# Altium PCB PCB2.PcbDoc
Units mm, origin at the board's own origin, x right, y up, seen from the top; angles counter-clockwise.
Board outline 53.97 x 60.32 mm, 2 copper layers (Top Layer, Bottom Layer); 19 components, 44 nets, 105 pads, 11 vias.
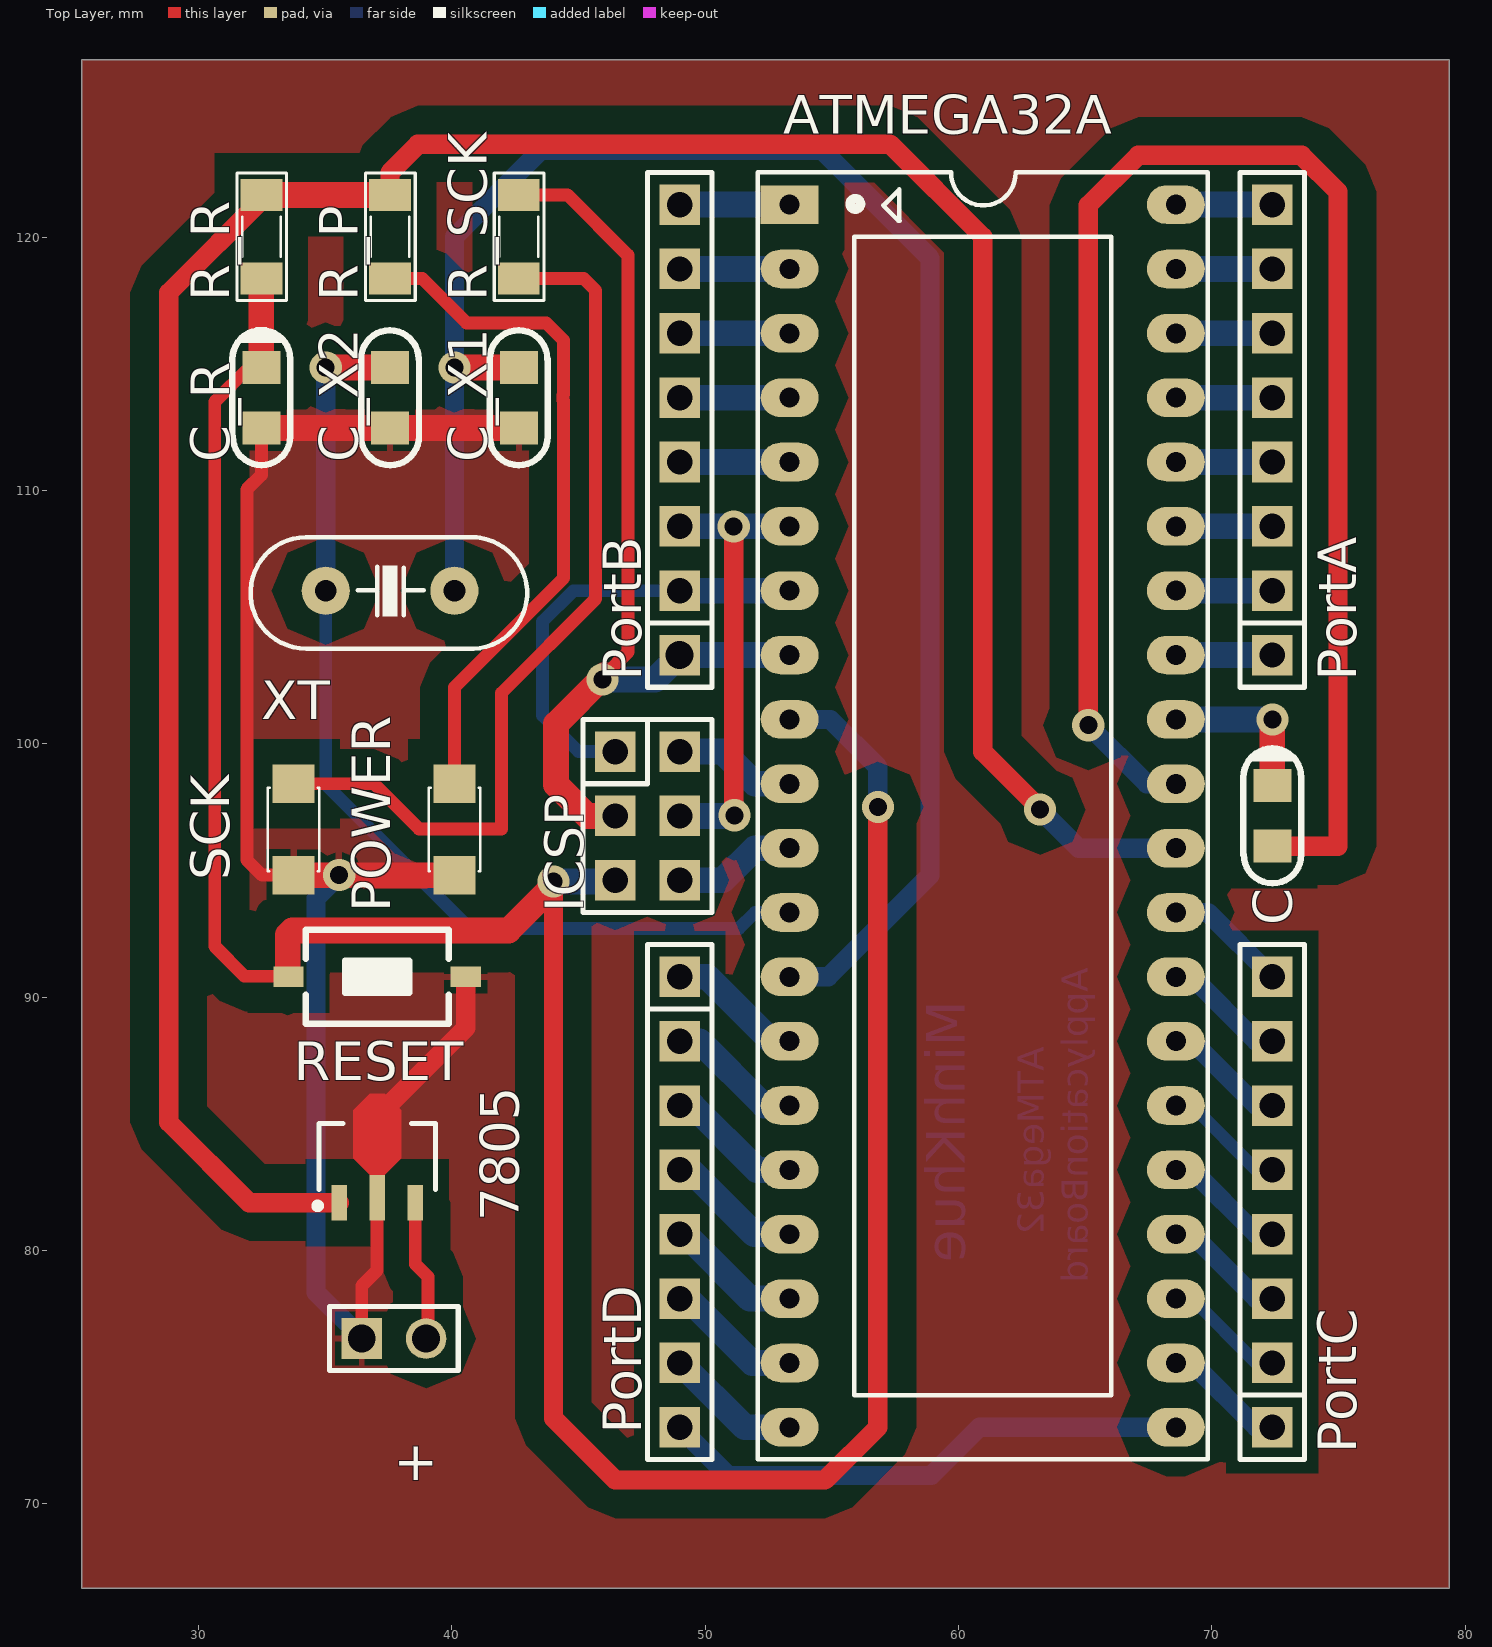
[diagram p0: Top Layer view]
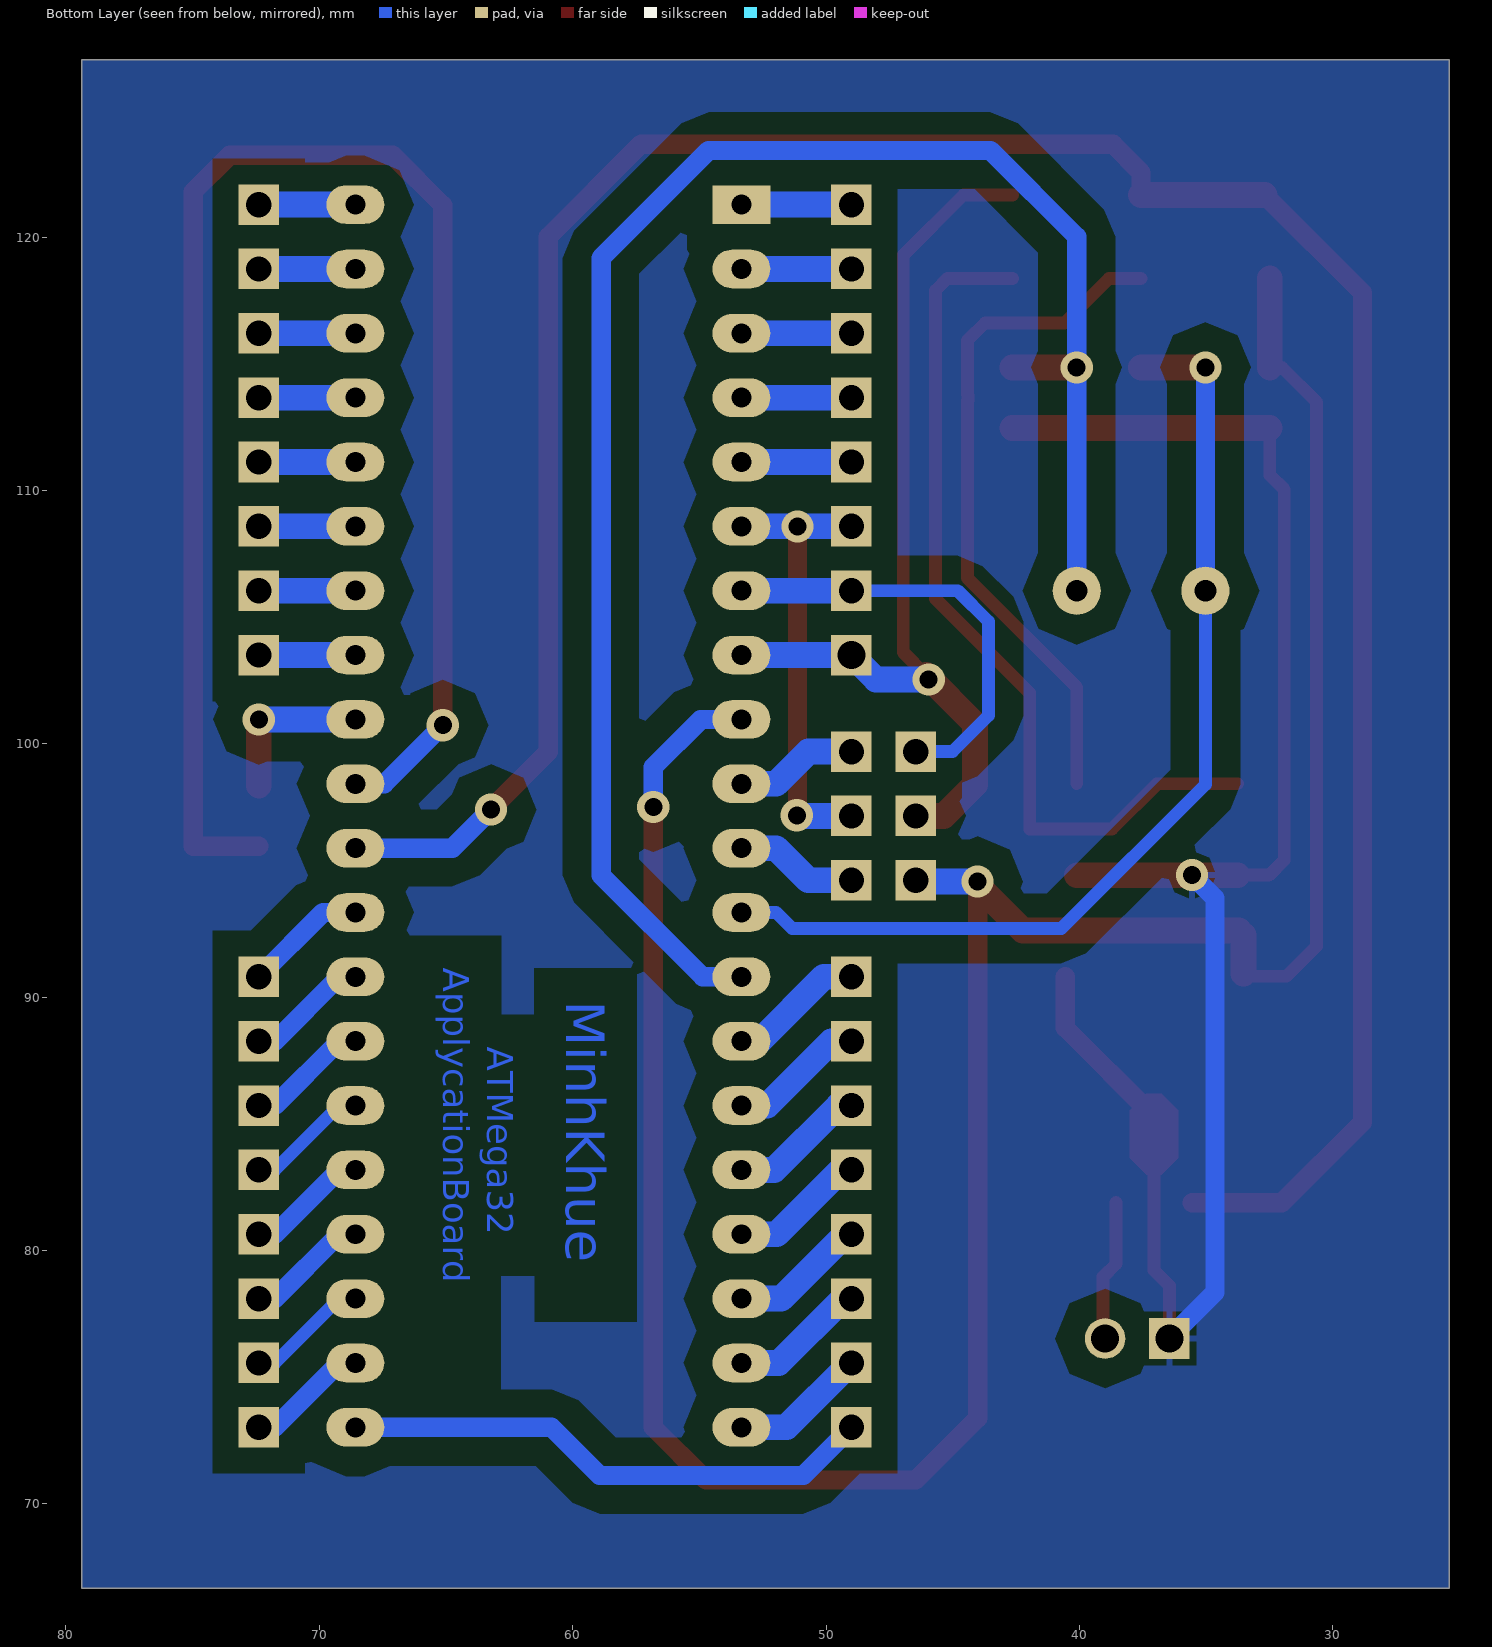
[diagram p1: Bottom Layer view, seen from below]
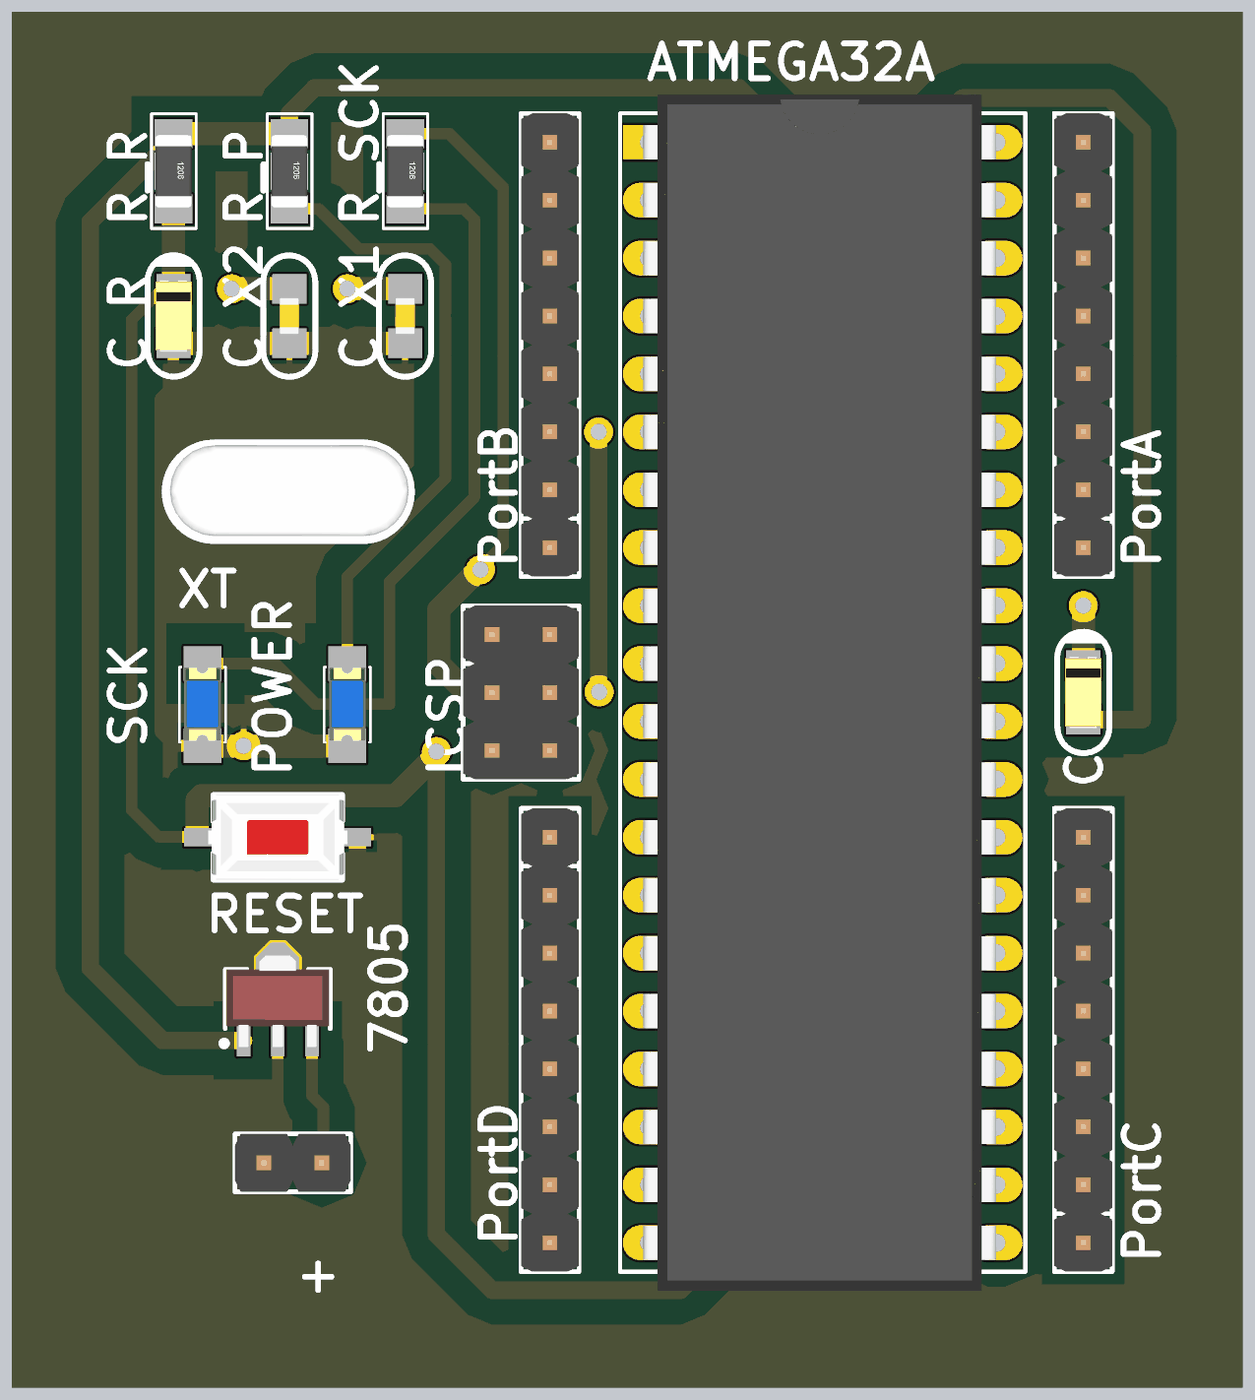
[diagram p2: 3D render of the assembled board from above, using the file's embedded part models]

## Layer stack, top to bottom
Top Solder: solder mask 0.0102, Solder Resist, Dk 3.5
Top Layer: signal copper 0.0356
Dielectric 1: dielectric 0.32, FR-4, Dk 4.8
Bottom Layer: signal copper 0.0356
Bottom Solder: solder mask 0.0102, Solder Resist, Dk 3.5

## Board outline
25.4,66.675 25.4,127 79.375,127 79.375,66.675

## Design rules (kind name [scope] priority, off if disabled: settings)
Clearance Clearance_1 [InPolygon] p1: gap=1.016
Clearance [All] p2: gap=0.762
PolygonConnect [All] p1: connectstyle=Relief reliefconductorwidth=0.254 reliefentries=4 polygonreliefangle="90 Angle" airgapwidth=0.254
RoutingVias [All] p1: holewidth=0.711 width=1.27 viastyle="Through Hole" minholewidth=0.711 minwidth=1.27 maxholewidth=0.711 maxwidth=1.27
SMDNeckDown [All] p1: percent=50.000
SolderMaskExpansion [All] p1: expansion=0.102
Width [All] p1: maxlimit=1.27 minlimit=0.508 preferedwidth=0.762
30 further rules are at their usual default settings.

## Components (designator, comment, footprint, x,y, rotation, side; value= is the part's Value field where it differs from the comment)
7805 "LM78xx" SOT89-321 37.059,83.693 r90 top
+ "KF2" JP2-D1T 36.449,76.53 r0 top (schematic designator J_P)
ATMEGA32A "ATmega32A-PU" DIP40/W0.6 53.34,121.285 r270 top
C "Cap Pol" C-P-0805 72.39,97.155 r270 top
C_R "Cap Pol" C-P-0805 32.487,113.665 r270 top
C_X1 "Cap Non-pol" C-NP-0805 42.647,113.665 r90 top
C_X2 "Cap Non-pol" C-NP-0805 37.567,113.665 r90 top
ICSP "JP3x2" JP3-D2T 47.727,97.155 r270 top
PortA "JP8" JP8-D1T#1 72.39,103.505 r90 top
PortB "JP8" JP8-D1T#2 48.997,103.505 r90 top
PortC "JP8" JP8-D1T#1 72.39,73.025 r90 top
PortD "JP8" JP8-D1T#1 48.997,90.805 r270 top
POWER "LED" LED-1206-Blue 40.107,98.425 r270 top (schematic designator LED_P)
R_P "330" RES-SMD-1206 37.567,120.015 r270 top
R_R "10K" RES-SMD-1206 32.487,120.015 r270 top
R_SCK "330" RES-SMD-1206 42.647,120.015 r270 top
RESET "SW" SW1-SMD 37.059,90.805 r180 top (schematic designator SW)
SCK "LED" LED-1206-Blue 33.757,98.425 r270 top (schematic designator LED_SCK)
XT "16Mhz" XT2 37.567,106.045 r180 top

## Footprints (in the part's own frame and the unit in brackets; to place one, negate y for a bottom-side part, rotate by r counter-clockwise, add the part's x,y. Pads: shape width x height; smd on the part's side, far side on the other; paste and mask are expansions set on the pad)
C-NP-0805 [mm] "Chip Capacitor; Non-polarized; Body 2.0 x 1.3 mm (LxW typ) [2012]"
  rect 1.3x1.5 smd: 1(-1.194,0) 2(1.194,0)
  silkscreen extent -2.67,-1.14 2.66,1.14, body extent -0.8,-0.43 0.8,0.43, height 0.79
C-P-0805 [mm] "Chip Capacitor; Polarized; Body 2.0 x 1.3 mm (LxW typ) [2012]"
  rect 1.3x1.5 smd: 1(-1.194,0) 2(1.194,0)
  silkscreen extent -2.67,-1.14 2.66,1.14, body extent -1.6,-0.8 1.6,0.8, height 1.61
DIP40/W0.6 [mil] "40 PIN, W 600mil, Pin to pin 100mil"
  rect 60x90 hole 31: 1(0,0)
  oval 60x90 hole 31: 2(100,0) 3(200,0) 4(300,0) 5(400,0) 6(500,0) 7(600,0) 8(700,0) 9(800,0) 10(900,0) 11(1000,0) 12(1100,0) 13(1200,0) 14(1300,0) 15(1400,0) 16(1500,0) 17(1600,0) 18(1700,0) 19(1800,0) 20(1900,0) 21(1900,600) 22(1800,600) 23(1700,600) 24(1600,600) 25(1500,600) 26(1400,600) 27(1300,600) 28(1200,600) 29(1100,600) 30(1000,600) 31(900,600) 32(800,600) 33(700,600) 34(600,600) 35(500,600) 36(400,600) 37(300,600) 38(200,600) 39(100,600) 40(0,600)
  silkscreen extent -50,-50 1950,650, body extent -82,-10 1982,600, height 224
JP2-D1T [mm] "2 pins, 1 row, straight, gold plating"
  rect 1.6x1.6 hole 1.1: 1(0,0)
  round 1.6 hole 1.1: 2(2.54,0)
  silkscreen extent -1.27,-1.27 3.81,1.27, body extent -1.27,-1.27 3.81,1.27, height 8.54
JP3-D2T [mm] "6 pins, dual pin, straight, gold plating"
  rect 1.6x1.6 hole 1: 1(-2.54,-1.27) 2(0,-1.27) 3(2.54,-1.27) 4(2.54,1.27) 5(0,1.27) 6(-2.54,1.27)
  silkscreen extent -3.81,-2.54 3.81,2.54, body extent -3.81,-2.54 3.81,2.54, height 8.55
JP8-D1T#1 [mm] "8 pins, 1 row, straight, gold plating"
  rect 1.6x1.6 hole 1: 1(0,0) 2(2.54,0) 3(5.08,0) 4(7.62,0) 5(10.16,0) 6(12.7,0) 7(15.24,0) 8(17.78,0)
  silkscreen extent -1.27,-1.27 19.05,1.27, body extent -1.27,-1.27 19.05,1.27, height 8.54
JP8-D1T#2 [mm] "8 pins, 1 row, straight, gold plating"
  rect 1.6x1.6 hole 1.1: 1(0,0)
  rect 1.6x1.6 hole 1: 2(2.54,0) 3(5.08,0) 4(7.62,0) 5(10.16,0) 6(12.7,0) 7(15.24,0) 8(17.78,0)
  silkscreen extent -1.27,-1.27 19.05,1.27, body extent -1.27,-1.27 19.05,1.27, height 8.54
LED-1206-Blue [mil] "Compoment SMD 120x60mil"
  rect 60x65 smd: 1(0,0) 2(142,0)
  silkscreen extent 6,-40 136,40, body extent 7,-31 133,32, height 43
RES-SMD-1206 [mil]
  rect 50x65 smd: 1(-65,0) 2(65,0)
  silkscreen extent -99,-38 99,39, body extent -63,-31 63,32, height 40
SOT89-321 [mm] "SOT89, 3-Leads, Body 4.55x2.55mm, Pitch 1.50mm, Lead Span 4.1mm, IPC Medium Density"
  rect 1.4x0.6 smd: 1(-1.8,-1.5) 3(-1.8,1.5)
  rect 1.8x0.6 smd: 2(-1.6,0)
  Top Layer region: -0.7,0.3 -0.05,0.95 1.85,0.95 2.5,0.3 2.5,-0.3 1.85,-0.95 -0.05,-0.95 -0.7,-0.3
  silkscreen extent -2.05,-2.3 1.32,2.47, body extent -2.08,-2.25 1.92,2.25, height 1.5
SW1-SMD [mm]
  rect 1.2x0.8 smd: 1(-3.5,0) 2(3.5,0)
  silkscreen extent -2.82,-1.85 2.82,1.85, body extent -3.05,-1.85 3.05,1.85, height 2.5
XT2 [mil] "Footpin for Crystal 2 pin"
  round 75 hole 34: 1(-100,0) 2(100,0)
  silkscreen extent -213,-83 217,90, body extent -216,-87 216,90, height 144

## Part data
7805: "Positive Voltage Regulator"
ATMEGA32A: "8-Bit AVR Microcontroller with 32K Bytes of In-System Programmable Flash Memory"
C C_R: "Polarized Capacitor"
C_X1 C_X2: "Non-polarized Capacitor"
ICSP: "WR-PHD 2.54 mm Dual Socket Header"
PortA PortB PortC PortD: "WR-PHD 2.54 mm Angled Socket Header"
POWER SCK: library part "LED SMD"
R_P R_R R_SCK: library part Res-SMD, "Resistor"
RESET: library part SW2, "Switch button 2 pin"
XT: library part XT2, "Crystal, 32.768 KHz, -40 to 85 degC, 3.2 x 1.5 x 0.9 mm SMD"

## Via types
v1: diameter 1.27, hole 0.711, Top Layer to Bottom Layer, 11 vias

## Nets (pads, with @x,y where several pads share a name; then routed paths per layer and width w, separated by ;. In a path a pad name is that pad's centre, name@x,y a point inside that pad or via, vN(x,y) a via of type N, cw(c..) or ccw(c..) an arc to the next point about the centre after c; other vN are vias at no path point)
GND: 7805.2 +.1 C_R.2 C_X1.1 C_X2.1 POWER.2 RESET.1 SCK.2 | length 71.3
  Top Layer w0.508: C_R.2 32.487,110.617 31.915,110.045 31.915,95.415 32.512,94.818 SCK.2 ; +.1 36.449,78.613 37.059,79.223 37.059,85.293
  Top Layer w0.762: 37.059,85.293 40.559,88.793 RESET.1
  Top Layer w1.016: C_R.2 C_X2.1 C_X1.1 ; SCK.2 v1(35.56,94.818) POWER.2
  Bottom Layer w0.762: v1(35.56,94.818) 34.646,93.904 34.646,78.359 36.349,76.656 +.1@36.349,76.43
NetATMEGA32A_1: ATMEGA32A.1 PortB.8 | length 4.3
  Bottom Layer w1.016: PortB.8 ATMEGA32A.1
NetATMEGA32A_2: ATMEGA32A.2 PortB.7 | length 4.3
  Bottom Layer w1.016: PortB.7 ATMEGA32A.2
NetATMEGA32A_3: ATMEGA32A.3 PortB.6 | length 4.3
  Bottom Layer w1.016: PortB.6 ATMEGA32A.3
NetATMEGA32A_4: ATMEGA32A.4 PortB.5 | length 4.3
  Bottom Layer w1.016: PortB.5 ATMEGA32A.4
NetATMEGA32A_5: ATMEGA32A.5 PortB.4 | length 4.3
  Bottom Layer w1.016: PortB.4 ATMEGA32A.5
NetATMEGA32A_6: ATMEGA32A.6 ICSP.5 PortB.3 | length 17.9
  Top Layer w0.508: v1@51.13,97.206 v1(51.156,97.18)
  Top Layer w0.762: v1@51.13,97.206 v1(51.13,108.585)
  Bottom Layer w0.508: v1@51.13,97.155 v1(51.156,97.18)
  Bottom Layer w1.016: ICSP.5 v1@51.13,97.155 ; PortB.3 v1(51.13,108.585) ATMEGA32A.6
NetATMEGA32A_7: ATMEGA32A.7 ICSP.1 PortB.2 | length 17.4
  Bottom Layer w0.508: ICSP.1 45.009,99.695 43.586,101.117 43.586,104.826 44.806,106.045 PortB.2
  Bottom Layer w1.016: PortB.2 ATMEGA32A.7
NetATMEGA32A_8: ATMEGA32A.8 ICSP.2 PortB.1 R_SCK.1 | length 38
  Top Layer w0.508: R_SCK.1 44.577,121.666 46.953,119.29 46.953,103.62 v1@46.05,102.718
  Top Layer w1.016: v1@46.05,102.718 44.12,100.787 44.12,98.387 45.352,97.155 ICSP.2
  Bottom Layer w1.016: v1(45.949,102.54) 48.031,102.54 PortB.1 ATMEGA32A.8
NetATMEGA32A_9: ATMEGA32A.9 C_R.1 ICSP.3 R_R.2 RESET.2 | length 111.7
  Top Layer w0.508: C_R.1@32.004,114.859 30.645,113.5 30.645,92.011 31.826,90.83 RESET.2@33.553,90.83 ; RESET.2@33.477,90.805 RESET.2
  Top Layer w0.762: v1@44.018,94.412 44.018,73.381 46.457,70.942 54.737,70.942 56.82,73.025 v1(56.82,97.511)
  Top Layer w1.016: C_R.1 32.487,116.586 R_R.2 ; RESET.2@33.528,90.932 33.528,92.456 33.706,92.634 42.24,92.634 v1@44.018,94.412
  Bottom Layer w0.508: ICSP.3@46.406,94.564 ICSP.3
  Bottom Layer w0.762: ATMEGA32A.9 54.94,100.965 56.82,99.085 v1(56.82,97.511)
  Bottom Layer w1.016: v1(44.018,94.564) ICSP.3@46.406,94.564
NetATMEGA32A_10: ATMEGA32A.10 ICSP.6 | length 4.9
  Bottom Layer w1.016: ICSP.6 50.698,99.695 51.968,98.425 ATMEGA32A.10
NetATMEGA32A_11: ATMEGA32A.11 ICSP.4 | length 4.9
  Bottom Layer w1.016: ICSP.4 50.698,94.615 51.968,95.885 ATMEGA32A.11
NetATMEGA32A_12: ATMEGA32A.12 C_X2.2 XT.2 | length 39.9
  Top Layer w1.016: v1(35.027,114.859) C_X2.2
  Bottom Layer w0.508: XT.2 35.027,98.4 40.716,92.71 51.333,92.71 51.968,93.345 ATMEGA32A.12
  Bottom Layer w0.762: XT.2 v1(35.027,114.859)
NetATMEGA32A_13: ATMEGA32A.13 C_X1.2 XT.1 | length 70
  Top Layer w1.016: v1(40.107,114.859) C_X1.2
  Bottom Layer w0.762: XT.1 v1(40.107,114.859) 40.107,120.015 43.51,123.419 54.635,123.419 58.877,119.177 58.877,94.818 54.864,90.805 ATMEGA32A.13
NetATMEGA32A_14: ATMEGA32A.14 PortD.1 | length 5.4
  Bottom Layer w1.016: PortD.1 50.085,90.805 52.625,88.265 ATMEGA32A.14
NetATMEGA32A_15: ATMEGA32A.15 PortD.2 | length 5.4
  Bottom Layer w1.016: PortD.2 49.784,88.265 52.324,85.725 ATMEGA32A.15
NetATMEGA32A_16: ATMEGA32A.16 PortD.3 | length 5.4
  Bottom Layer w1.016: PortD.3 49.505,85.725 52.045,83.185 ATMEGA32A.16
NetATMEGA32A_17: ATMEGA32A.17 PortD.4 | length 5.4
  Bottom Layer w1.016: PortD.4 49.403,83.185 51.943,80.645 ATMEGA32A.17
NetATMEGA32A_18: ATMEGA32A.18 PortD.5 | length 5.4
  Bottom Layer w1.016: PortD.5 49.225,80.645 51.765,78.105 ATMEGA32A.18
NetATMEGA32A_19: ATMEGA32A.19 PortD.6 | length 5.4
  Bottom Layer w1.016: PortD.6 49.327,78.105 51.867,75.565 ATMEGA32A.19
NetATMEGA32A_20: ATMEGA32A.20 PortD.7 | length 5.4
  Bottom Layer w0.508: PortD.7 PortD.7@49.025,75.565
  Bottom Layer w1.016: PortD.7@49.025,75.565 51.565,73.025 ATMEGA32A.20
NetATMEGA32A_21: ATMEGA32A.21 PortD.8 | length 21.2
  Bottom Layer w0.762: PortD.8 50.902,71.12 58.928,71.12 60.833,73.025 ATMEGA32A.21
NetATMEGA32A_22: ATMEGA32A.22 PortC.1 | length 4.9
  Bottom Layer w0.762: ATMEGA32A.22 69.215,75.565 71.755,73.025 PortC.1
NetATMEGA32A_23: ATMEGA32A.23 PortC.2 | length 4.9
  Bottom Layer w0.508: ATMEGA32A.23 69.215,78.105 71.755,75.565 PortC.2
NetATMEGA32A_24: ATMEGA32A.24 PortC.3 | length 4.9
  Bottom Layer w0.762: ATMEGA32A.24 69.215,80.645 71.755,78.105 PortC.3
NetATMEGA32A_25: ATMEGA32A.25 PortC.4 | length 4.9
  Bottom Layer w0.762: ATMEGA32A.25 69.215,83.185 71.755,80.645 PortC.4
NetATMEGA32A_26: ATMEGA32A.26 PortC.5 | length 4.9
  Bottom Layer w0.508: ATMEGA32A.26 69.215,85.725 71.755,83.185 PortC.5
NetATMEGA32A_27: ATMEGA32A.27 PortC.6 | length 4.9
  Bottom Layer w0.762: ATMEGA32A.27 69.215,88.265 71.755,85.725 PortC.6
NetATMEGA32A_28: ATMEGA32A.28 PortC.7 | length 4.9
  Bottom Layer w0.762: ATMEGA32A.28 69.215,90.805 71.755,88.265 PortC.7
NetATMEGA32A_29: ATMEGA32A.29 PortC.8 | length 4.9
  Bottom Layer w0.762: ATMEGA32A.29 69.85,93.345 PortC.8
NetATMEGA32A_31: ATMEGA32A.31 C.2 | length 65
  Top Layer w0.508: v1@65.126,100.609 v1@65.278,100.457
  Top Layer w0.762: v1@65.126,100.609 65.126,121.26 67.094,123.228 73.546,123.228 74.981,121.793 74.981,95.961 C.2
  Bottom Layer w0.762: v1(65.126,100.736) 67.437,98.425 ATMEGA32A.31
NetATMEGA32A_32: ATMEGA32A.32 C.1 | length 6.4
  Top Layer w1.016: C.1 v1(72.39,100.965)
  Bottom Layer w1.016: ATMEGA32A.32 v1(72.39,100.965)
NetATMEGA32A_33: ATMEGA32A.33 PortA.1 | length 3.8
  Bottom Layer w1.016: ATMEGA32A.33 PortA.1
NetATMEGA32A_34: ATMEGA32A.34 PortA.2 | length 3.8
  Bottom Layer w1.016: ATMEGA32A.34 PortA.2
NetATMEGA32A_35: ATMEGA32A.35 PortA.3 | length 3.8
  Bottom Layer w1.016: ATMEGA32A.35 PortA.3
NetATMEGA32A_36: ATMEGA32A.36 PortA.4 | length 3.8
  Bottom Layer w1.016: ATMEGA32A.36 PortA.4
NetATMEGA32A_37: ATMEGA32A.37 PortA.5 | length 3.8
  Bottom Layer w1.016: ATMEGA32A.37 PortA.5
NetATMEGA32A_38: ATMEGA32A.38 PortA.6 | length 3.8
  Bottom Layer w1.016: ATMEGA32A.38 PortA.6
NetATMEGA32A_39: ATMEGA32A.39 PortA.7 | length 3.8
  Bottom Layer w1.016: ATMEGA32A.39 PortA.7
NetATMEGA32A_40: ATMEGA32A.40 PortA.8 | length 3.8
  Bottom Layer w1.016: ATMEGA32A.40 PortA.8
NetLED_P_1: POWER.1 R_P.2 | length 27.2
  Top Layer w0.508: R_P.2 38.837,118.364 40.589,116.611 43.731,116.611 44.413,115.93 44.413,113.788 44.399,113.775 44.399,113.555 44.413,113.542 44.413,106.541 40.107,102.235 POWER.1
NetLED_SCK_1: R_SCK.2 SCK.1 | length 35
  Top Layer w0.508: SCK.1 36.932,98.425 38.71,96.647 41.961,96.647 41.961,102.006 45.683,105.728 45.683,117.893 45.212,118.364 R_SCK.2
VCC: 7805.3 ATMEGA32A.30 R_P.1 R_R.1 | length 107.1
  Top Layer w0.508: R_R.1 R_R.1@32.69,121.666
  Top Layer w0.762: R_R.1@32.69,121.666 28.829,117.805 28.829,85.065 32.001,81.893 7805.3 ; R_P.1 37.567,122.555 38.684,123.673 ; 38.659,123.673 57.302,123.673 60.96,120.015 60.96,99.695 v1@63.208,97.447
  Top Layer w1.016: R_R.1@32.69,121.666 R_P.1
  Bottom Layer w0.762: v1(63.221,97.409) 64.745,95.885 ATMEGA32A.30
VIN: 7805.1 +.2 | length 5.5
  Top Layer w0.508: 7805.1 38.559,79.473 39.063,78.969 +.2@39.063,76.581

## Polygon pours and split planes (outlines as drawn)
GND on Bottom Layer "Mechanical 1-No Net" (solid, pour order 2): 25.4,127 79.375,127 79.375,66.675 25.4,66.675 25.4,127
GND on Top Layer "Mechanical 1-No Net" (solid, pour order 4): 25.4,127 79.375,127 79.375,66.675 25.4,66.675 25.4,127

## Other copper
Bottom Layer:
  text "ApplycationBoard" at 65.1,91.161 h1.02 r90
  text "MinhKhue" at 60.249,89.865 h1.52 r90
  text "ATMega32" at 63.373,88.036 h1.02 r90